# Altium PCB Irrigation_System.PcbDoc
Units mm, origin at the board's own origin, x right, y up, seen from the top; angles counter-clockwise.
Board outline 147.8 x 76.68 mm, 2 copper layers (Top Layer, Bottom Layer); 23 components, 29 nets, 100 pads, 0 vias.
Unrouted connection lines stored in the file: 41.
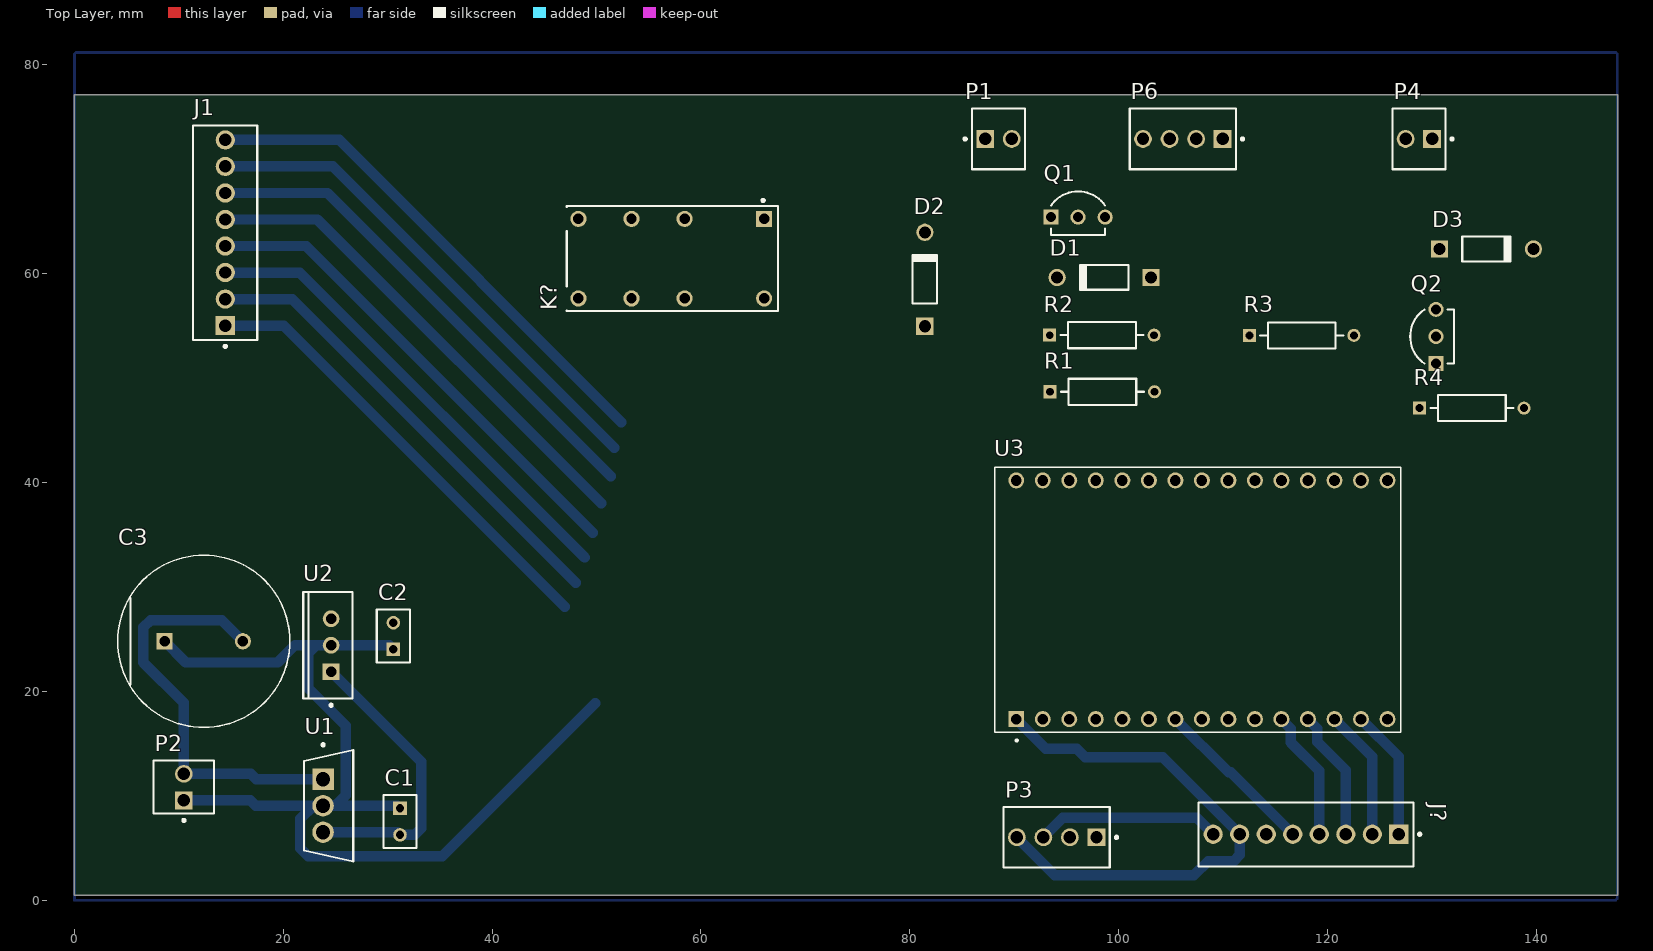
[diagram p0: Top Layer view]
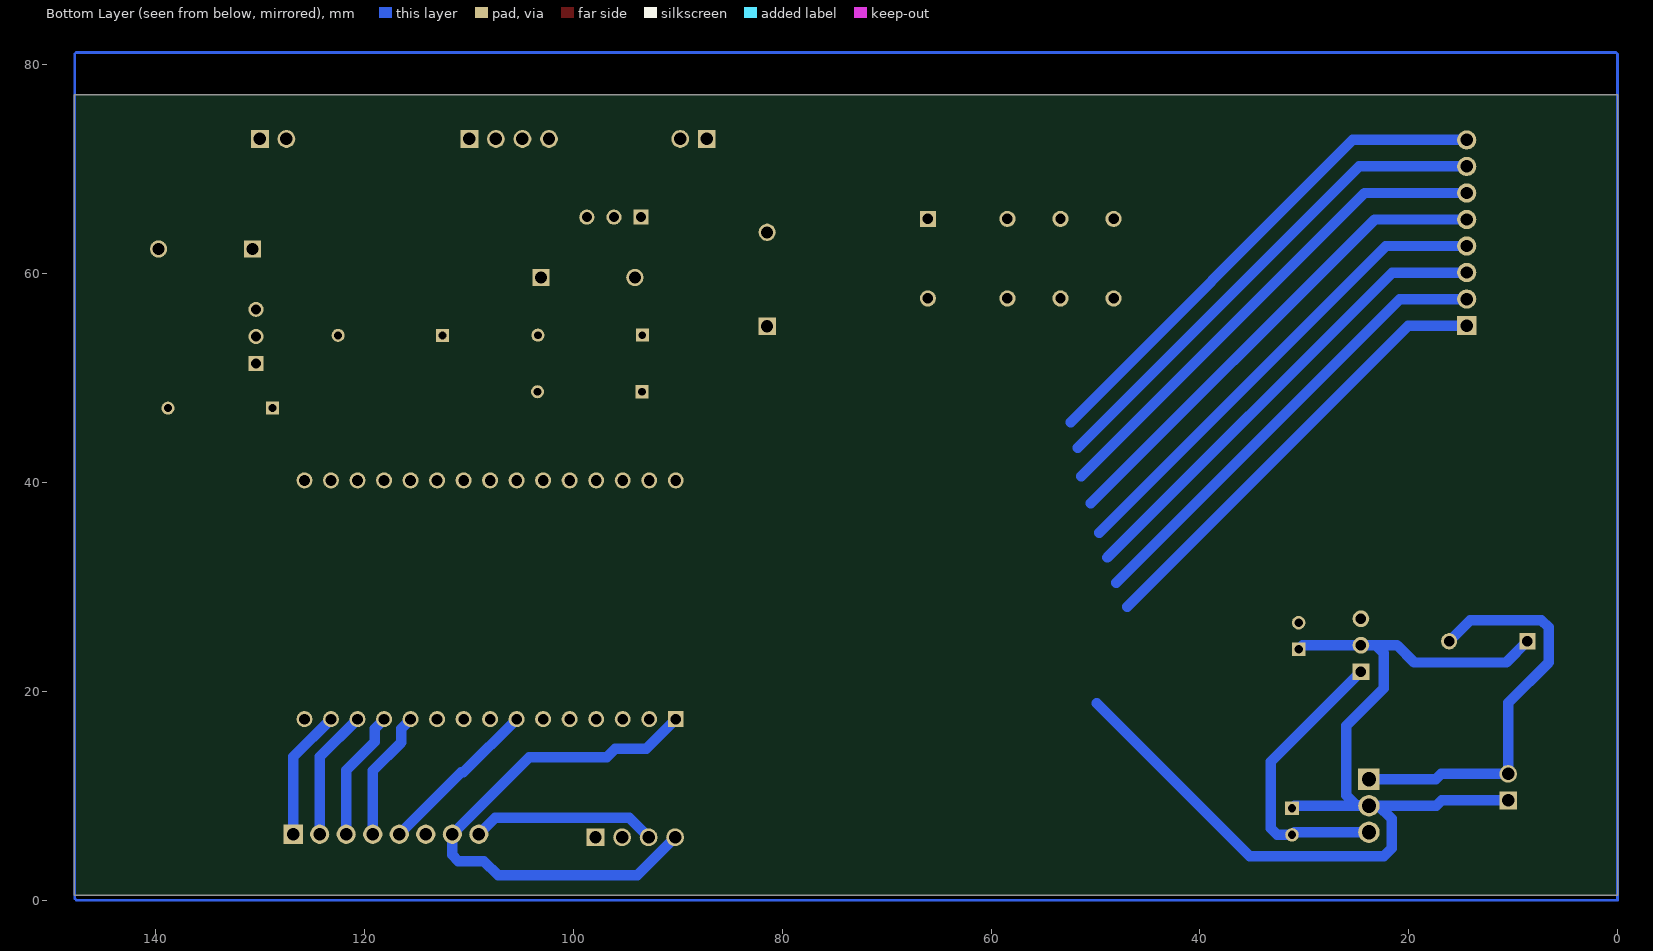
[diagram p1: Bottom Layer view, seen from below]

## Layer stack, top to bottom
Top Solder: solder mask 0.0102, Solder Resist, Dk 3.5
Top Layer: signal copper 0.0356
Dielectric 1: dielectric 0.32, FR-4, Dk 4.8
Bottom Layer: signal copper 0.0356
Bottom Solder: solder mask 0.0102, Solder Resist, Dk 3.5

## Board outline
0,0.475 0,77.15 147.8,77.15 147.8,0.475

## Design rules (kind name [scope] priority, off if disabled: settings)
Clearance [All] p1: gap=0.254 ignorepadtopadclearanceinfootprint=FALSE
PolygonConnect [All] p1: connectstyle=Relief reliefconductorwidth=0.254 reliefentries=4 polygonreliefangle="90 Angle" airgapwidth=0.254
RoutingLayers [All] p1: top layer_v5=FALSE bottom layer_v5=TRUE
RoutingVias [All] p1: holewidth=0.711 width=1.27 viastyle="Through Hole" minholewidth=0.711 minwidth=1.27 maxholewidth=0.711 maxwidth=1.27
SolderMaskExpansion [All] p1: expansion=0.102 istentingtop=FALSE
SupplyNets "Schematic Supply Nets_3" [InNet('+12V')] p1: voltage=0.000
SupplyNets "Schematic Supply Nets_2" [InNet('GND')] p2: voltage=0.000
SupplyNets "Schematic Supply Nets_1" [InNet('+5V')] p3: voltage=0.000
SupplyNets "Schematic Supply Nets" [InNet('+24V')] p4: voltage=0.000
Width [All] p1: maxlimit=1.778 minlimit=1 preferedwidth=1.778 toplayer_minwidth=1.778 bottomlayer_maxwidth=1 bottomlayer_prefwidth=1 minimp=50.000000 maximp=50.000000 favimp=50.000000
29 further rules are at their usual default settings.

## Components (designator, comment, footprint, x,y, rotation, side; value= is the part's Value field where it differs from the comment)
C1 "100nf" CAPR51-254-508X318X736 31.181,7.53 r270 top
C2 "100nf" CAPR51-254-508X318X736 30.546,25.31 r90 top
C3 "1000uf" FP-RAD-TH-D_16_0_5-L_25_2-MFG 12.385,24.802 r0 top
D1 "1N4001-T" DIOD-DO-41-P-2_V 98.625,59.65 r180 top
D2 "1N4001-T" DIOD-DO-41-P-2_V 81.45,59.475 r90 top
D3 "1N4001-T" DIOD-DO-41-P-2_V 135.242,62.373 r0 top
J1 "Keypad (4x4)" FP-22-29-2081-MFG 14.43,63.93 r270 top
J? "Nokia Screen (5110)" FP-22-29-2081-MFG 117.96,6.3 r0 top
K? "V23105A5305A201" FP-V23105A5305A201-MFG 57.275,61.45 r180 top
P1 "FAN (Connect)" MOLX-22-27-2021_V 88.506,72.914 r0 top
P2 "+24V IN" MOLX-22-27-2021_V 10.48,10.832 r90 top
P3 "22-27-2041" MOLX-22-27-2041_V 94.08,6.025 r0 top
P4 "Water Pump (Connect)" MOLX-22-27-2021_V 128.765,72.914 r180 top
P6 "Hygrometer Humidity" MOLX-22-27-2041_V 106.159,72.914 r0 top
Q1 "2N7000-D74Z" FP-135AR-MFG 96.126,65.802 r90 top
Q2 "2N7000-D74Z" FP-135AR-MFG 130.035,53.991 r180 top
R1 "220 ohms" FP-MRS25-MFG 98.45,48.7 r0 top
R2 "100.0k ohms" FP-MRS25-MFG 98.412,54.118 r0 top
R3 "220 ohms" FP-MRS25-MFG 117.55,54.1 r0 top
R4 "100.0 ohm" FP-MRS25-MFG 133.845,47.133 r0 top
U1 "LM7812CT" FP-TO220B03-MFG 24.355,9.049 r0 top
U2 "LM7805CT" FAIR-TO-220-3 24.577,24.421 r180 top
U3 "ESP32" XCVR_ESP32-C3-DEVKITC-02 107.6,28.775 r90 top

## Footprints (in the part's own frame and the unit in brackets; to place one, negate y for a bottom-side part, rotate by r counter-clockwise, add the part's x,y. Pads: shape width x height; smd on the part's side, far side on the other; paste and mask are expansions set on the pad)
CAPR51-254-508X318X736 [mm] "THD, 2-Leads, Body 5.08x3.18mm"
  rect 1.3x1.3 hole 0.8: 1(-1.27,0)
  round 1.3 hole 0.8: 2(1.27,0)
  silkscreen extent -2.54,-1.59 2.54,1.59, body extent -2.54,-1.59 2.54,1.59, height 7.36
DIOD-DO-41-P-2_V [mm] "2-Leads, Axial Lead, Body 4.635x2.36mm, Pin Spacing 9mm"
  rect 1.65x1.65 hole 1.15: 1(-4.5,0)
  round 1.65 hole 1.15: 2(4.5,0)
  silkscreen extent -2.32,-1.18 2.32,1.18, body extent -4.93,-1.18 4.93,1.18, height 2.35
FAIR-TO-220-3 [mm] "FM, 3-Leads, Body 10.2x4.7mm, Pitch 2.54mm"
  rect 1.6x1.6 hole 1: 1(0,2.54)
  round 1.6 hole 1: 2(0,0) 3(0,-2.54)
  silkscreen extent -2.04,-5.1 2.66,5.87, body extent -2.04,-5.1 2.66,5.1, height 18.95
FP-22-29-2081-MFG [mm]
  rect 1.84x1.84 hole 1.19 paste-2539.97 mask+0: 1(8.89,0.02)
  round 1.84 hole 1.19 paste-2539.97 mask+0: 2(6.35,0.02) 3(3.81,0.02) 4(1.27,0.02) 5(-1.27,0.02) 6(-3.81,0.02) 7(-6.35,0.02) 8(-8.89,0.02)
  silkscreen extent -10.29,-3.08 11.01,3.07, body extent -10.39,-3.18 10.39,3.17, height 0.25
FP-135AR-MFG [mm]
  rect 1.45x1.45 hole 0.95 paste-2539.97 mask+0: 1(-0.38,2.6)
  round 1.45 hole 0.95 paste-2539.97 mask+0: 2(-0.38,0) 3(-0.38,-2.6)
  silkscreen extent -2.1,-2.6 2.09,2.6, body extent -2.19,-3.42 2.19,3.42, height 0.25
FP-MRS25-MFG [mm]
  rect 1.25x1.25 hole 0.75 paste-2539.97 mask+0: 1(-5,0)
  round 1.25 hole 0.75 paste-2539.97 mask+0: 2(5,0)
  silkscreen extent -3.97,-1.25 3.98,1.25, body extent -5.72,-1.35 5.72,1.35, height 0.25
FP-RAD-TH-D_16_0_5-L_25_2-MFG [mm]
  rect 1.55x1.55 hole 1 paste-2539.97 mask+0: 1(-3.75,0)
  round 1.55 hole 1 paste-2539.97 mask+0: 2(3.75,0)
  silkscreen extent -8.25,-8.25 8.25,8.25, body extent -8.35,-8.35 8.35,8.35, height 0.25
FP-TO220B03-MFG [mm]
  rect 2.05x2.05 hole 1.35 paste-2539.97 mask+0: 1(-0.54,2.535)
  round 2.05 hole 1.35 paste-2539.97 mask+0: 2(-0.54,0) 3(-0.54,-2.535)
  silkscreen extent -2.35,-5.33 2.35,5.96, body extent -2.45,-5.44 2.45,5.44, height 0.25
FP-V23105A5305A201-MFG [mm]
  rect 1.55x1.55 hole 1 paste-2539.97 mask+0: 1(-8.78,-3.81)
  round 1.55 hole 1 paste-2539.97 mask+0: 4(-1.16,-3.81) 6(3.92,-3.81) 8(9,-3.81) 9(9,3.81) 11(3.92,3.81) 13(-1.16,3.81) 16(-8.78,3.81)
  silkscreen extent -10.12,-5.7 10.13,5.02, body extent -10.23,-5.13 10.23,5.13, height 0.25
MOLX-22-27-2021_V [mm] "Header, 2-Leads, Body 5.8x5.08mm"
  rect 1.7x1.7 hole 1.19: 1(-1.27,0)
  round 1.7 hole 1.19: 2(1.27,0)
  silkscreen extent -3.31,-2.9 2.54,2.9, body extent -2.54,-2.9 2.54,2.9, height 11.72
MOLX-22-27-2041_V [mm] "CONN, 4-Leads, Body 10.16x5.8mm, Pitch 2.54mm"
  rect 1.7x1.7 hole 1.19: 1(3.81,0)
  round 1.7 hole 1.19: 2(1.27,0) 3(-1.27,0) 4(-3.81,0)
  silkscreen extent -5.08,-2.9 5.86,2.9, body extent -5.08,-2.9 5.08,2.9, height 11.7
XCVR_ESP32-C3-DEVKITC-02 [mm]
  rect 1.53x1.53 hole 1.02: 1(-11.43,17.392)
  round 1.53 hole 1.02: 2(-11.43,14.852) 3(-11.43,12.312) 4(-11.43,9.772) 5(-11.43,7.232) 6(-11.43,4.692) 7(-11.43,2.152) 8(-11.43,-0.388) 9(-11.43,-2.928) 10(-11.43,-5.468) 11(-11.43,-8.008) 12(-11.43,-10.548) 13(-11.43,-13.088) 14(-11.43,-15.628) 15(-11.43,-18.168) 16(11.43,-18.168) 17(11.43,-15.628) 18(11.43,-13.088) 19(11.43,-10.548) 20(11.43,-8.008) 21(11.43,-5.468) 22(11.43,-2.928) 23(11.43,-0.388) 24(11.43,2.152) 25(11.43,4.692) 26(11.43,7.232) 27(11.43,9.772) 28(11.43,12.312) 29(11.43,14.852) 30(11.43,17.392)
  silkscreen extent -13.56,-19.45 12.7,19.45

## Part data
C1 C2: library part CMP-1664-00004-1, "Radial Leaded Multilayer Ceramic Capacitor, 0.1 uF, +/- 10%, 50 V, -55 to 125 degC, 2-Pin THD, RoHS, Tape and Reel", Case\Package=SOT-23-5, Dropout Voltage="260 mV", Max Input Voltage="8 V", Max Operating Temperature="85 degC", Max Power Dissipation="250 mW", Min Operating Temperature="-40 degC", Output Current="150 mA", Output Voltage="5 V", Package Quantity=3000, ComponentLink1Description="Manufacturer URL", ComponentLink1URL=http://www.kemet.com/, ComponentLink2Description=Datasheet, ComponentLink2URL=http://www.kemet.com/docfinder?Partnumber=C320C104K5R5TA, DatasheetVersion=Dec-15, Height="1.3 mm", Length="3 mm", Mount="Surface Mount", Outputs=1, PackageDescription="2-Pin Through Hole Device, Body 5.08 x 3.18 mm, Pitch 2.54 mm", PackageReference=CAPR51-254-508X318X736, Packaging="Tape and Reel", Pins=5, Radiation Hardening=No, RoHSCompliant=true, Width="1.8 mm"
C3: library part CMP-05427-000487-1, "Aluminum Electrolytic Capacitors (Radial Lead Type) 1000uF ±20% 50V", Capacitance=1mF, Case/Package=Radial, ESR (Equivalent Series Resistance)=16mR, Max Operating Temperature=105°C, Min Operating Temperature=-40°C, Package Quantity=250, Ripple Current=3.32A, Tolerance=20%, Voltage Rating=50V, Contact Plating=Tin, Diameter=16mm, Features="General Purpose", Height=25mm, Height - Seated (Max)=0.984inch, Impedance=16mR, Lead Diameter=0.8mm, Lead Free="Lead Free", Lead Pitch=7.5mm, Length=25mm, Life (Hours)=10000Hour, Mount="Through Hole", Number of Pins=2, Packaging="Tape and Reel", Polarity=Polar, Radiation Hardening=No, REACH SVHC="No SVHC", RoHS Compliant=Yes, Series=FR, Termination="Through Hole", Voltage Rating (DC)=50V
D1 D2 D3: library part CMP-0639-00006-2, "1.0 A Rectifier, 15 pF, 50 V, -65 to 150 degC, 2-Pin DO-41 Plastic, RoHS, Tape and Reel", Manufacturer="Diodes Inc", Max. Average Rectified Current IO (A)=1, Operating Temperature Range (degC)="-65 to 150", ComponentLink1Description="Manufacturer URL", ComponentLink1URL=http://diodes.com/, ComponentLink2Description=Datasheet, ComponentLink2URL=http://diodes.com/datasheets/ds28002.pdf, CT (pF)=15, DatasheetVersion="Rev. 8-2", Max. IFSM (A)=30, Max. IR (uA)=5, Mounting Technology="Through Hole", PackageDescription="2-Pin Axial Lead, Body 4.635 x 2.36 mm, Lead Spread 25.4 mm", PackageReference=DO-41-P-2, Packing="Tape and Reel", PartNumber=1N4001-T, RoHS=TRUE, VF (V)=1, VRRM (V)=50
J1 J?: library part CMP-00257-00277737-1, "22-29-2081 KK® 254 Wire-to-Board Header, Vertical, with Friction Lock, 8 Circuits, Gold (Au) Plating", Color=White, Contact Resistance=10mΩ, Current Rating=4A, Flammability Rating="UL94 V-0", Insulation Resistance=50GΩ, Max Operating Temperature=75°C, Min Operating Temperature=-40°C, Voltage Rating=250V, Contact Material=Brass, Contact Plating=Gold, Gender=Male, Glow Wire Compliant=Non-compliant, Halogen Free="Low Halogen", Height=11.42mm, Housing Material=Nylon, Lead Free="Lead Free", Lead Pitch=2.54mm, Mount="Through Hole", NexarPartId=277737, Number of Circuits=8, Number of Contacts=8, Number of Pins=8, Number of Positions=8, Number of Rows=1, Orientation=Vertical, Packaging=Bulk, Pitch=2.54mm, Radiation Hardening=No, REACH SVHC=Unknown, RoHS=Compliant, Schedule B=8536694040, Termination="Through Hole", Voltage Rating (DC)=250V
K?: library part CMP-03395-000159-1, "RELAY TELECOM DPDT 3A 24V", Ambient Temperature Range High=+85°C, Ambient Temperature Range Low=-40°C, Coil Power=200mW, Coil Resistance=2880Ω, Coil Voltage=24V, Current Rating=3A, Manufacturer="TE Connectivity", Temperature="-40°C to +85°C", Automotive=No, Category=Relay, Coil Type=Non-Latching, ComponentLink2Description=Datasheet, ComponentLink2URL=https://www.te.com/commerce/DocumentDelivery/DDEController?Action=showdoc&DocId=Specification+Or+Standard%7F108-98007%7F1017%7Fpdf%7FEnglish%7FENG_SS_108-98007_1017.pdf%7F9-1393792-9, Device Class L1=Electromechanical, Device Class L2=Relays, Device Class L3="Power Relays", Digikey Description="RELAY TELECOM DPDT 3A 24V", Height=10.9mm, Lead Free=Yes, Manufacturer Part Number=V23105A5305A201, Number of Contacts=2, Octopart=https://octopart.com/9-1393792-9-te+connectivity-41176539, Package=V23105A5305A201, RoHS=TRUE, Standoff Height=0.2mm, Switching Current=3A, Temperature Range High=+85°C, Temperature Range Low=-40°C, Throw Configuration=DPDT
P1 P2 P4: library part CMP-2000-05537-1, "Male Header, Pitch 2.54 mm, 1 x 2 Position, Height 11.7 mm, Tail Length 3.56 mm, 0 to 75 degC, RoHS, Bulk", Current - Max=4A, Manufacturer=Molex, Operating temperature=0°Cto+75°C, Package Description="2-Leads Header, Body 5.08 x 5.8 mm, Pitch 2.54 mm", Package Reference=22-27-2021, Package Version="Rev. BC, 02/2012", PartNumber=0022272021, Voltage - Max=250V, Contact Material=Tinplatedbrass, Current Rating=4A, Datasheet URL=http://www.molex.com/pdm_docs/sd/022272021_sd.pdf, Datasheet Version="Rev. F, 06/2009", Housing Material=Nylon(UL94V-0), Manufacturer URL=http://www.molex.com/, Mounting Technology=ThroughHole, No. of Positions=2, No. of Rows=1, Orientation=Vertical, Pitch=2.54mm, Voltage Rating=250V
P3 P6: library part CMP-2000-05243-1, "Male Header, Pitch 2.54 mm, 1 x 4 Position, Height 11.7 mm, Tail Length 3.56 mm, RoHS, Bulk", Current Rating=4A, Manufacturer=Molex, Operating temperature=0degCto+75degC, Voltage Rating=250V, Contact Material=Tinplatedbrass, Datasheet URL=http://www.molex.com/pdm_docs/sd/022272041_sd.pdf, Datasheet Version="Rev. F, 06/2009", Housing Material=Nylon(UL94V-0), Manufacturer URL=http://www.molex.com/
Q1 Q2: library part CMP-00278-84793556-1, "2N7000-D74Z 2N7000 Series 60V 5 Ohms N-Ch Enhancement Mode Field Effect Transistor - TO-92", Continuous Drain Current (ID)=200mA, Drain to Source Breakdown Voltage=60V, Drain to Source Resistance=1.2Ω, Gate to Source Voltage (Vgs)=20V, Manufacturer Lifecycle Status=ACTIVE, Max Junction Temperature (Tj)=150°C, Min Operating Temperature=-55°C, Power Dissipation=400mW, Drain to Source Voltage (Vdss)=60V, Height=8.77mm, Lifecycle Status=Production, Max Operating Temperature=150°C, NexarPartId=84793556, Number of Channels=1, RoHS=Compliant, Schedule B=8541210080
R1 R2 R3 R4: library part CMP-00030-42632392-1, "MRS25000C1002FCT00 Resistor, 10 kOhm, ± 1%, 600 mW, Axial Leaded, Metal Film (Thin Film), Professional", Case/Package=Conformal, Max Operating Temperature=155°C, Max Power Dissipation=600mW, Min Operating Temperature=-55°C, Resistance=10kΩ, Temperature Coefficient=50ppm/°C, Tolerance=1%, Voltage Rating=350V, Composition="Metal Film, Thin Film", Contact Plating=Tin, Diameter=2.5mm, Lead Free="Lead Free", Lead Length=26mm, Length=6.5mm, Military Standard=Not, Mount="Through Hole", NexarPartId=42632392, Number of Pins=2, Number of Terminations=2, Power Rating=600mW, Radiation Hardening=No, REACH SVHC=Unknown, RoHS=Compliant, Schedule B="8533210090, 8533210090", Termination=Axial, Voltage Rating (DC)=350V, Width=2.5mm
U1: library part CMP-07128-000015-1, "IC REG LINEAR 12V 1A TO220-3", Dropout Voltage=2V, Manufacturer="ON Semiconductor", Max Supply Voltage=35V, Nominal Supply Current=5.1mA, Output Current=1A, Output Voltage=12V, Package=TO220B03, Temperature="-40°C to +125°C", Temperature Range High=+125°C, Temperature Range Low=-40°C, Accuracy Percentage=4%, Automotive=No, Category=IC, ComponentLink2Description=Datasheet, ComponentLink2URL=https://www.mouser.in/datasheet/2/308/LM7812-1125088.pdf, Device Class L1="Integrated Circuits (ICs)", Device Class L2="Power Management ICs", Device Class L3="Voltage Regulators - Linear", Digikey Description="IC REG LINEAR 12V 1A TO220-3", Height=20.4mm, Ipc Land Pattern Name=TO-220, Lead Free=Yes, Manufacturer Part Number=LM7812CT, Number Of Outputs=1, Obsolete Part=true, Octopart=https://octopart.com/lm7812ct-on+semiconductor-14383031, Output Type=Fixed, RoHS=TRUE, Standoff Height=2.7mm
U2: library part CMP-2000-04938-1, "Positive Voltage Regulator, 5 V, 1 A, -40 to 125 degC, 3-Pin TO-220, RoHS, Tube", Manufacturer=FairchildSemiconductor, Maximum Input Voltage=35V, Maximum Output Current=2.2(Typ)A, Maximum Quiescent Current=8mA, Operating temperature=-40to125degC, Output Voltage=5V, Package=3TO-220AB, Package Description="3-Pin Through Hole Device, Body 10 x 4.5 mm, Pitch 2.54 mm", Package Reference=TO-220, Typical Dropout Voltage @ Current=2@1AV, Accuracy=±4%, Category=LinearRegulator, Datasheet URL=https://datasheet.ciiva.com/26904/lm7805ct-26904988.pdf, Datasheet Version=Aug-12, Line Regulation=100mV, Load Regulation=100mV, Manufacturer URL=https://www.fairchildsemi.com/, Mounting=ThroughHole, Number Of Outputs=1, Output Type=Fixed, Package URL=https://www.fairchildsemi.com/package-drawings/TO/TO220B03.pdf, Packaging=Rail/Tube, Polarity=Positive, Rad Hard=No, Type=Linear
U3: library part ESP32-C3-DEVKITC-02, "Development Boards & Kits - Wireless (Engineering Samples) ESP32-C3 General-Purpose Development Board, embeds ESP32-C3-WROOM-02, 4 MB Flash, with Pin Header", Package=None, Availability="In Stock", Check_prices=https://www.snapeda.com/parts/ESP32-C3-DevKitC-02/Espressif+Systems/view-part/?ref=eda, MF="Espressif Systems", MP=ESP32-C3-DevKitC-02, Price=None, Purchase-URL=https://pricing.snapeda.com/search/part/ESP32-C3-DevKitC-02/?ref=eda, SnapEDA_Link=https://www.snapeda.com/parts/ESP32-C3-DevKitC-02/Espressif+Systems/view-part/?ref=snap

## Nets (pads, with @x,y where several pads share a name; then routed paths per layer and width w, separated by ;. In a path a pad name is that pad's centre, name@x,y a point inside that pad or via, vN(x,y) a via of type N, cw(c..) or ccw(c..) an arc to the next point about the centre after c; other vN are vias at no path point)
+3.3V: J?.7 P3.4 P6.4 U3.1 | length 51.6
  Bottom Layer w1: U3.1 93.03,14.523 96.014,14.523 96.827,13.71 104.22,13.71 J?.7 111.61,4.336 111.024,3.75 108.575,3.75 107.225,2.4 93.895,2.4 P3.4
+5V: C2.2 D1.2 D3.2 J?.6 K?.1 P4.1 U2.3 U3.30
+12V: C1.2 K?.13 U1.3 U2.1 | length 28.3
  Bottom Layer w1: U1.3 30.927,6.514 C1.2 32.578,6.26 33.213,6.895 33.213,13.245 U2.1
+24V: C3.2 P2.2 U1.1 | length 39.8
  Bottom Layer w1: C3.2 14.103,26.834 7.305,26.834 6.603,26.132 6.603,22.77 10.48,18.893 P2.2 16.889,12.102 17.407,11.584 U1.1
"A0 (Analogue)": P6.1 U3.19
CE: J?.2 U3.13 | length 12.5
  Bottom Layer w1: U3.13 124.31,13.723 J?.2
CLK: J?.5 U3.7 | length 15.8
  Bottom Layer w1: U3.7 110.556,12.237 110.773,12.237 J?.5
"Column (01)": J1.5 U3.25 | length 47.3
  Bottom Layer w1: J1.5 23.275,65.2 50.45,38.025
"Column (02)": J1.6 U3.26 | length 48.1
  Bottom Layer w1: J1.6 24.235,67.74 51.35,40.625
"Column (03)": J1.7 U3.27 | length 48.4
  Bottom Layer w1: J1.7 24.745,70.28 51.7,43.325
"Column (04)": J1.8 U3.28 | length 49.1
  Bottom Layer w1: J1.8 25.355,72.82 52.375,45.8
"D0 (Digital)": P6.2
DC: J?.3 U3.12 | length 12.5
  Bottom Layer w1: U3.12 119.052,16.441 119.052,15.158 121.77,12.44 J?.3
"DHT22 Data": P3.1 U3.4
DIN: J?.4 U3.11 | length 12.5
  Bottom Layer w1: U3.11 116.512,16.441 116.512,15.107 119.23,12.389 J?.4
"Fan Switch (Control)": R1.1 U3.24
GND: C1.1 C2.1 C3.1 D2.1 J?.8 P1.2 P2.1 P3.3 P6.3 Q1.1 Q2.1 R2.1 R4.1 U1.2 U2.2 U3.2 U3.29 | length 120.2
  Bottom Layer w1: C3.1 10.667,22.77 19.472,22.77 21.123,24.421 23.18,24.421 ; P2.1 16.854,9.562 17.367,9.049 U1.2@22.896,9.049 ; C2.1 30.165,24.421 U2.2 23.18,24.421 ; C1.1 30.932,9.049 U1.2 ; 49.875,18.858 35.245,4.228 22.393,4.228 21.631,4.99 21.631,7.784 U1.2@22.896,9.049 ; P3.3 94.679,7.894 107.496,7.894 J?.8 ; U1.2@22.896,9.049 U1.2 ; 23.18,24.421 22.393,23.634 22.393,20.306 25.999,16.699 25.999,10.07 25.079,9.149 U1.2
NetD1_1: D1.1 K?.16 Q1.3
NetD2_2: D2.2 K?.11 P1.1
NetD3_1: D3.1 P4.2 Q2.3
NetQ1_2: Q1.2 R1.2 R2.2
NetQ2_2: Q2.2 R3.2 R4.2
NULL: P3.2
"Row (01)": J1.1 U3.8 | length 43.7
  Bottom Layer w1: J1.1 20.035,55.04 46.975,28.1
"Row (02)": J1.2 U3.9 | length 44.8
  Bottom Layer w1: J1.2 20.845,57.58 48,30.425
"Row (03)": J1.3 U3.10 | length 45.7
  Bottom Layer w1: J1.3 21.58,60.12 48.875,32.825
"Row (04)": J1.4 U3.15 | length 46.6
  Bottom Layer w1: J1.4 22.19,62.66 49.65,35.2
RST: J?.1 U3.14 | length 12.5
  Bottom Layer w1: U3.14 126.85,13.723 J?.1
"Water Pump (Control)": R3.1 U3.23
pads on no net: K?.4 K?.6 K?.8 K?.9 U3.3 U3.5 U3.6 U3.16 U3.17 U3.18 U3.20 U3.21 U3.22
copper on no net: | length 457.7
  Bottom Layer w0.254: 0,0 147.626,0 147.775,0.149 147.775,81.051 147.626,81.2 0.149,81.2 0,81.051 0,0